# EAGLE board Module-WiFi-M0-v0.2-Board-1 (EAGLE 7.5.0)
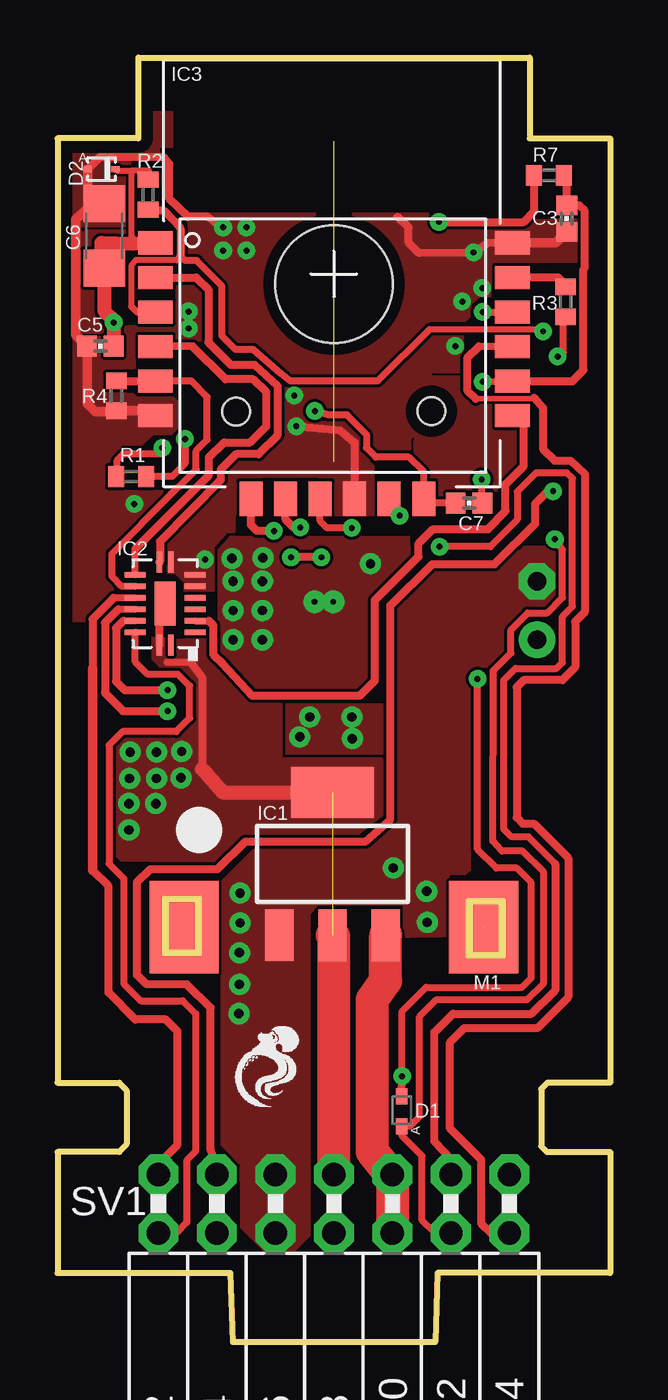
[diagram p0: board, top side]
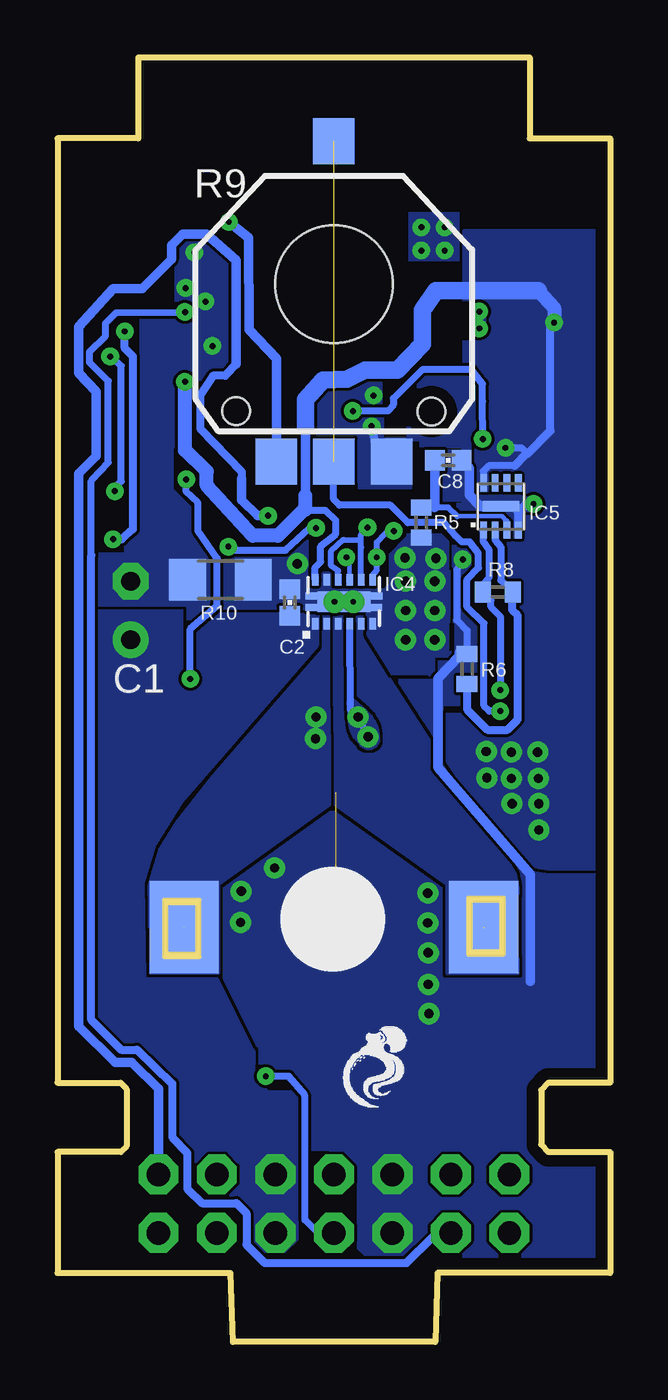
[diagram p1: board, bottom side, seen from below]

Size 24 x 55.75 mm. Coordinates in mm from the lower left corner, seen from the top.
Outline: 0,3 7.5,3 7.6,0 16.4,0 16.5,3 24,3 24,8.25 21.25,8.25 21,8.5 21,10.98 21.27,11.25 24,11.25 24,52.25 20.5,52.25 20.5,55.75 3.5,55.75 3.5,52.25 0,52.25 0,11.25 2.68,11.25 3,10.93 3,8.57 2.68,8.25 0,8.25 0,3
Copper layers (1*16): Top 0.035mm / dielectric 1.5mm / Bottom 0.035mm
Design rules "advancedCkt_temp *": minimum track width 5mil, minimum drill 10mil, track to track 5mil, track to pad 5mil, pad to pad 5mil, via to via 5mil, smd to smd 5mil, copper to edge 20mil, drill to drill 10mil, minimum pad ring 14mil, minimum via ring 10mil, stop-mask expansion 4mil, vias tented up to drill 0mil, thermal gap 10mil
tRestrict: area 5.5,32.4 to 6.8,32.5; area 4.4,51.6 to 5,51.8; 73 lines
bRestrict: area 5.2,48.3 to 6.5,49; area 8.8,46.1 to 9,49.1; area 21.1,34.3 to 22.4,34.4; area 18.4,31 to 18.5,31.9; area 6.8,30 to 7,31.2; area 6.9,31 to 6.9,31.5; area 13,33.7 to 13.1,35; area 18.9,45 to 19.1,46.5; area 20.4,42.9 to 20.5,44.5; area 8.2,36.9 to 11,37; area 6.5,27.3 to 7.2,27.6; area 13.8,10.9 to 14.8,11; 5 more areas; 24 lines

## Footprints (pad centres in the part's own frame; a part is rotated, then mirrored left to right if it is on the bottom)
CAP-SLEEP = drill 0.813 pad 1.575: + 1.27,0 | drill 0.813 pad 1.575 octagon: - -1.27,0
0402-CAP = smd 0.85 x 0.9: 1 -0.58,0; 2 0.58,0
1206 = smd 1.6 x 1.8: 1 -1.4,0; 2 1.4,0
SOD523 = smd 0.7 x 0.5: A 0.7,0; C -0.6,0
SOD-923 = smd 0.36 x 0.25: A -0.6,0; C 0.6,0
SOT223 = smd 1.219 x 2.235: 1 -2.311,-3.099; 2 0,-3.099; 3 2.311,-3.099 | smd 3.6 x 2.2: 4 0,3.099
DHVQFN16 = smd 0.24 x 0.9: 1 -0.25,1.8; 8 -0.25,-1.8; 9 0.25,-1.8; 16 0.25,1.8 | smd 0.9 x 0.24: 2 -1.3,1.25; 3 -1.3,0.75; 4 -1.3,0.25; 5 -1.3,-0.25; 6 -1.3,-0.75; 7 -1.3,-1.25; 10 1.3,-1.25; 11 1.3,-0.75; 12 1.3,-0.25; 13 1.3,0.25; 14 1.3,0.75; 15 1.3,1.25 | smd 0.9 x 1.9: EPAD 0,0
WT8266 = smd 1.5 x 1: 1 -7.75,1.35; 2 -7.75,-0.15; 3 -7.75,-1.65; 4 -7.75,-3.15; 5 -7.75,-4.65; 6 -7.75,-6.15; 13 7.75,-6.15; 14 7.75,-4.65; 15 7.75,-3.15; 16 7.75,-1.65; 17 7.75,-0.15; 18 7.75,1.35 | smd 1 x 1.5: 7 -3.6,-9.75; 8 -2.1,-9.75; 9 -0.6,-9.75; 10 0.9,-9.75; 11 2.4,-9.75; 12 3.9,-9.75
DSS12_P9X2 = smd 0.5 x 0.28: 1 -0.959,1.25; 2 -0.959,0.75; 3 -0.959,0.25; 4 -0.959,-0.25; 5 -0.959,-0.75; 6 -0.959,-1.25; 7 0.959,-1.25; 8 0.959,-0.75; 9 0.959,-0.25; 10 0.959,0.25; 11 0.959,0.75; 12 0.959,1.25 | smd 0.9 x 2.3: 13 0,0 | smd 0.305 x 0.61: 13@1 -0.25,1.36; 13@2 0.25,1.36; 13@3 -0.25,-1.36; 13@4 0.25,-1.37 | drill 0.254 pad 0.508: G1 0,0.406; G2 0,-0.406
DFN-8 = smd 0.3 x 0.75: 1 -0.75,-1.025; 2 -0.25,-1.025; 3 0.25,-1.025; 4 0.75,-1.025; 5 0.75,1.025; 6 0.25,1.025; 7 -0.25,1.025; 8 -0.75,1.025 | smd 1.6 x 0.45: PAD 0,0
MOTOR-NO_HOLE = smd 3 x 4: M1@1 6.5,0; M2@1 -6.51,0 | smd 3 x 4 bottom: M1@2 6.5,0; M2@2 -6.5,0
R0402 = smd 0.7 x 0.9: 1 -0.65,0; 2 0.65,0
ANGLE_SENSOR_MURATA = smd 1.8 x 2: 1 -2.5,-7.7; 2@1 0,-7.7; 2@2 0,6.2; 3 2.5,-7.7 | hole 5.1: 0,0 | hole 1.2: -4.24,-5.51; 4.24,-5.53
R1206 = smd 1.6 x 1.803: 1 -1.422,0; 2 1.422,0
FE07-2W = drill 1.016 octagon: 1 -7.62,1.27; 2 -7.62,-1.27; 3 -5.08,1.27; 4 -5.08,-1.27; 5 -2.54,1.27; 6 -2.54,-1.27; 7 0,1.27; 8 0,-1.27; 9 2.54,1.27; 10 2.54,-1.27; 11 5.08,1.27; 12 5.08,-1.27; 13 7.62,1.27; 14 7.62,-1.27

## Placement (x,y rotation side)
C1  47uF, 25V  [CAP-SLEEP]  20.82,31.75 270 bottom
C2  10uF  [0402-CAP]  13.91,32.09 90 bottom
C3  0.1uF  [0402-CAP]  22.11,48.76 270 top
C5  10uF  [0402-CAP]  1.86,43.22 180 top
C6  100u  [1206]  2.03,48.02 90 top
C7  10u  [0402-CAP]  17.87,36.41 0 top
C8  0.1uF  [0402-CAP]  7.03,38.26 0 bottom
D1  PMEG3005EB  [SOD523]  14.94,10.06 270 top
D2  ESD9X5  [SOD-923]  1.91,50.91 0 top
IC1  LM1117_3.3VSOT223  [SOT223]  11.94,20.75 0 top
IC2  74HC4051_DHVQFN16  [DHVQFN16]  4.67,32.05 180 top
IC3  WT8266  [WT8266]  12,46.36 0 top
IC4  DRV8835DSSR  [DSS12_P9X2]  11.57,32.13 90 bottom
IC5  LM358-DFN  [DFN-8]  4.75,36.27 0 bottom
M1  Round Motor  [MOTOR-NO_HOLE]  12,18 0 top
R1  3k  [R0402]  3.19,37.56 180 top
R2  3k  [R0402]  3.93,49.79 90 top
R3  30k  [R0402]  22.06,45.15 90 top
R4  30k  [R0402]  2.56,41.07 90 top
R5  30k  [R0402]  8.21,35.57 270 bottom
R6  3k  [R0402]  6.22,29.21 270 bottom
R7  30k  [R0402]  21.34,50.64 180 top
R8  30k  [R0402]  4.88,32.55 0 bottom
R9  10k  [ANGLE_SENSOR_MURATA]  12,45.92 0 bottom
R10  0.02E, 1W  [R1206]  16.92,33.08 180 bottom
SV1  [FE07-2W]  12,6 0 top

## Library data of the parts
C1 D2 IC2 IC3 M1 R9 = 1_ZeroUI
C2 C3 C5 C7 C8 = 1_ZeroUI; PROD_ID: CAP-12416
C6 = SparkFun-Passives
D1 = diode
IC1 = 1_ZeroUI; PROD_ID: VREG-08170
IC4 = 1_ZeroUI; MANUFACTURER_PART_NUMBER: drv8835_dss_12; VENDOR: Texas Instruments
IC5 = 1_ZeroUI; VARIANT: DFN
R1-R8 R10 = rcl
SV1 = con-lsta; OC_FARNELL: unknown; OC_NEWARK: unknown

## Nets
3.3V: C3.1 C5.1 C6.1 D2.C IC1.2 IC1.4 IC2.16 IC2.EPAD IC3.1 IC3.14 IC4.12 IC5.8 R1.2 R2.2 R7.1 SV1.7
CHG_ON: IC2.12 SV1.1
DTR: C7.2 D1.C SV1.8
GND: C1.- C3.2 C5.2 C6.2 C8.2 D2.A IC1.1 IC2.6 IC2.7 IC2.8 IC3.6 IC3.10 IC3.18 IC5.4 IC5.PAD R4.1 R6.1 R9.3 R10.2 SV1.5 SV1.6
LED-G: IC3.16 SV1.4
MOT-1: IC4.2 IC4.4 M1.M1@1 M1.M1@2
MOT-2: IC4.3 IC4.5 M1.M2@1 M1.M2@2
MOT_IN1: IC3.8 IC4.8 IC4.10
MOT_IN2: IC3.7 IC4.7 IC4.9
MOT_IRAW: C2.2 IC4.6 IC4.11 IC4.13 IC4.13@1 IC4.13@2 IC4.13@3 IC4.13@4 IC4.G1 IC4.G2 R5.2 R10.1
MOT_ISNS: IC2.14 IC5.1 R8.1
MOT_POS: IC2.13 R9.2@1 R9.2@2
MUX_COM: IC2.3 IC3.13
MUX_S0: IC2.11 IC3.5 R4.2
MUX_S1: IC2.10 IC3.4
MUX_S2: IC2.9 IC3.2
N$1: IC3.17 R3.2
N$10: C8.1 IC5.3 R5.1
N$17: R7.2 R9.1
N$18: IC5.2 R6.2 R8.2
PROGL/LED-B: D1.A IC3.3 R2.1 SV1.12
PWR_EN: R3.1 SV1.3
RST: C7.1 IC3.12 R1.1
RXD/LED-R: IC3.9 SV1.11
SW_INT: IC3.15 SV1.14
TXD: IC3.11 SV1.13
VBATT_SENSE: IC2.15 SV1.2
VDD: C1.+ C2.1 IC1.3 IC4.1 SV1.9 SV1.10

## Tracks (layer width: path | path; a pad name or v marks a point on that pad's centre or on a via)
3.3V  (via drill 0.25, 0.41)  (1 unrouted)
  Top 0.254: R2.2 3.96,50.85 3.23,50.85 | 3.23,47.92 3.23,50.85 | D2.C 2.57,50.85 3.23,50.85
  Top 0.305: 1.91,45.99 1.91,46.84 | 2.59,37.9 2.59,38.28 2.87,38.56 4.47,38.56 v4.55,38.81 | 4.75,29.51 5.77,29.51 | v18.47,41.68 IC3.14
  Top 0.356: C6.1 1.91,45.99 | 3.26,47.68 3.23,47.92 | IC3.14 22.35,41.71 22.84,42.19 22.84,46.56 22.89,46.62 22.89,49.1 22.66,49.33 22.12,49.33 C3.1 22.11,50.52 R7.1 | R1.2 2.59,37.9 | IC2.16 4.42,31.8 IC2.EPAD | 5.77,29.51 6.27,28.85 6.27,24.87
  Top 0.406: C6.1 2.03,46.37 | 2.44,44.35 v2.44,44.25
  Top 0.61: 1.91,46.84 1.91,47.71 3.26,47.68 IC3.1 | 2.03,46.37 2.03,44.76 2.44,44.35 | v2.44,44.25 C5.1 | 6.27,24.87 7.16,23.85 IC1.4
  Top 1.422: SV1.7 12,17.59 IC1.2
  Bottom 0.305: IC4.12 12.82,33.61 12.57,33.86 12.57,34.54 11.91,35.08 11.91,35.66 12.37,36.09 13.26,36.09 | 13.34,36.09 13.26,36.09 | 13.26,36.09 13.23,36.12 | v2.44,44.25 | v4.55,38.81 3.86,38.81 3.58,38.53 3.58,38.56 | 4.15,38.04 5.27,38.04 5.51,37.8 5.51,37.21 IC5.8
  Bottom 0.356: v2.44,44.25 2.59,44.09 2.59,39.55 3.58,38.56 3.63,38.56 4.15,38.04
  Bottom 0.406: 13.23,36.73 13.23,39.73
  Bottom 0.61: 13.34,36.09 14.43,35 15.52,35 17.53,37.18 17.53,37.8 18.47,38.71 v18.47,41.68 | 13.23,36.12 13.23,36.73 | 3.12,45.64 2.44,44.88 v2.44,44.25
  Bottom 0.762: 13.23,39.73 13.23,40.89 12.47,41.76 11.43,41.78 10.64,42.19 9.25,42.19 8.16,43.32 8.16,44.78 7.57,45.64 3.12,45.64
  other vias: 3.1,23.37 3.1,22.23 4.29,25.6 3.15,25.6 3.12,24.46 4.29,24.46 5.38,25.63 5.36,24.49 4.27,23.37
  pour Top (no thermals): 13.06,22.05 14.15,22.91 14.1,25.3 9.73,25.3 9.73,27.68 8.3,27.7 7.06,29.18 6.63,29.62 6.63,30.51 6.68,30.56 0.1,30.51 0.13,25.53 -0.05,25.78 -0.05,20.42 0.03,20.32 7.11,20.32 7.1,20.68 8.25,22.05
  pour Bottom (no thermals): -5.16,20.47 2.68,20.52 arc50 3.86,21.08 6.3,24.02 7.21,25.43 7.44,25.81 7.39,29.44 6.27,29.49 6.35,38.79 6.35,48.26 -5.16,48.26
CHG_ON
  Top 0.305: IC2.12 2.43,32.3
  Top 0.356: 2.43,32.3 1.52,31.37 1.52,29.26 | SV1.1 4.38,7.73 5.21,8.56 5.21,13.49 4.7,13.99 3.38,13.99 2.21,15.16 2.21,19.79 1.52,20.47
  Top 0.406: 1.52,20.47 1.52,29.26
DTR  (via drill 0.25)
  Top 0.305: v18.41,37.44 18.41,36.4 C7.2 | v14.96,11.53 14.96,14.35 16,15.39 20.17,15.39 20.57,15.8 20.57,19.94 19.94,20.57 19.05,20.57 18.24,21.39 v18.24,28.78
  Top 0.356: D1.C v14.96,11.53
  Bottom 0.305: SV1.8 12.68,4.73 13.23,5.28 13.26,5.28 13.26,10.69 13.97,11.53 v14.96,11.53 | v18.24,28.78 18.24,30.94 17.07,31.95 17.07,34.01 17.91,35.2 17.91,36.42 18.41,36.91 v18.41,37.44
GND  (via drill 0.25, 0.41)
  Top 0.254: C6.2 1.51,49.37
  Top 0.305: v18.06,47.3 18.08,47.27 | v7.19,48.39 7.09,48.39 6.53,48.84
  Top 0.356: 4.04,40.42 IC3.6 | R4.1 2.53,40.39 | v10.36,39.75 12.27,39.57 12.9,39.04 12.9,38.43 IC3.10 | IC3.18 18.69,47.7 18.08,47.27 15.7,47.27 15.24,47.73 15.24,48.39 14.76,48.84 | 6.53,48.84 5.66,48.84 4.85,49.63 4.85,51.13 4.6,51.44 1.83,51.44 D2.A
  Top 0.406: 4.04,40.42 R4.1 | 2.53,40.39 1.63,40.39 1.28,40.73 C5.2 0.79,43.71 0.79,48.74 1.51,49.37 1.31,49.57 D2.A | C3.2 21.64,47.71 IC3.18
  Bottom 0.305: v6.4,33.96 6.67,33.52 6.67,31.33 6.22,30.89 6.22,30.86 R6.1
  Bottom 0.356: v10.36,39.75 10.24,39.12 9.88,38.83 | IC5.4 4,36.03 4.24,36.27 IC5.PAD
  Bottom 0.406: R9.3 9.88,38.83 9.75,38.1 | 3.48,15.65 3.48,20.3 7.49,24.94 7.49,28.8 6.55,29.77 6.55,29.93 R6.1 | IC5.PAD 5.64,36.27 6.12,36.75 6.12,37.93 C8.2 | v3.33,36.37 3.65,36.37 4,36.03
  other vias: 7.92,19.48 16.05,18.21 7.9,15.52 14.58,20.57 7.87,14.25 7.9,16.89 7.92,18.19 17.58,45.16 18.44,45.75 17.27,43.23 10.28,41.08 8.2,48.39 8.2,47.37 7.19,47.37 5.69,43.99 5.69,44.73 16.03,19.56
  pour Bottom (rank 6, no thermals): 0,0 24.13,0 24.13,55.88 0,55.88
  pour Top (rank 6, no thermals): 7.11,3.81 11.15,3.81 11.15,17.53 17.98,17.65 18.03,32.84 14.61,32.82 14.58,23.09 13.26,22 7.11,22
  pour Top (rank 2, no thermals): 24.56,39.32 15.44,39.32 15.44,29.29 24.56,29.29
  pour Top (isolate 0.025, rank 2, no thermals): -5.08,53.34 30.48,53.34 30.53,35.15 15.32,35.03 7.47,35.03 6.86,34.42 6.83,34.42 6.83,31.34 -5.03,31.34
LED-G  (via drill 0.25)
  Top 0.305: v18.47,44.7 IC3.16
  Bottom 0.305: 22.53,34.14 22.53,37.39 21.79,38.17 21.79,41.71 22.61,42.52 22.61,42.98 21.92,43.66 21.92,44.22 21.46,44.68 v18.47,44.7
  Bottom 0.356: 22.53,34.14 22.53,13.97 21.25,12.69 20.55,12.69 19.02,11.2 19.02,8.89 18.36,8.2 18.36,6.66 17.73,6.02 16.23,6.02 15.8,5.59 15.8,4.22 15.01,3.43 8.84,3.43 7.72,4.55 7.1,4.55 SV1.4
MOT-1  (via drill 0.41)  (1 unrouted)
  Bottom 0.305: IC4.4 11.29,27.43 v10.95,27.13 v10.52,26.26
  other vias: 12.8,26.19 12.78,27.13
  pour Bottom (rank 3, no thermals): 12.23,31.97 12.23,28.09 12.19,25.81 12.19,23.32 12.19,23.32 17,19.86 17,16 20,16 20.08,19.9 19.48,21.74 15.49,26.82 12.58,30.2 12.6,30.5 12.6,32
  pour Bottom (rank 2, no thermals): 11.32,27 11.38,27.77 arc131 11.16,27.87 10.61,27.39 arc49 10.06,26.16 arc130 10.79,25.86 10.84,25.96 arc51
  pour Top (rank 4, no thermals): 9.88,27.69 14.2,27.66 14.2,25.37 9.88,25.4
MOT-2  (1 unrouted)
  Bottom 0.254: 5.4,18 M1.M2@2
  pour Bottom (rank 3, no thermals): 3.99,16 3.99,19.69 4.1,20.27 4.43,20.81 10.79,30.66 10.67,31.52 11.05,31.52 11,23.34 11.92,23.29 7.11,19.87 7.11,16
  pour Bottom (rank 4, no thermals): 12.34,23.32 12.34,25.17 12.12,25.73 12.12,31.67 11.48,31.67 10.26,23.34
MOT_IN1  (via drill 0.25)
  Top 0.356: v10.54,35.36 10.24,35.36 9.9,35.69 IC3.8
  Bottom 0.254: IC4.10 11.82,33.48 12.12,33.68 12.12,34.34 11.58,34.82 10.85,34.8 10.82,35.05 | 10.82,35.05 v10.54,35.36 | IC4.8 10.82,34.49 10.82,35.05
MOT_IN2  (via drill 0.25)
  Top 0.356: v11.46,34.06 v10.14,34.06 | v9.4,35.2 8.66,35.2 8.4,35.47 IC3.7
  Bottom 0.203: IC4.7 10.32,33.27 | IC4.9 11.32,33.95 v11.46,34.06
  Bottom 0.254: 10.32,33.27 10.13,33.5 v10.14,34.06 10.14,34.72 9.75,35.1 9.63,35.2 v9.4,35.2
MOT_IRAW  (via drill 0.41)
  other vias: 13.59,33.78 8.92,34.04 8.89,30.48 8.89,33.02 7.57,34.01 7.62,33.02 7.62,31.75 8.89,31.75 7.62,30.48
  pour Bottom (no thermals): 17.78,35.03 6.73,35.08 6.81,34.32 6.65,29.74 7.67,29.74 7.72,26.21 10.52,30.71 10.54,31.8 17.81,31.83
  pour Top (no thermals): 15.27,34.92 7.49,34.92 6.99,34.37 6.99,29.77 8.51,28.02 14.45,28.04 14.45,31.88 15.33,32.72
MOT_ISNS  (via drill 0.25)
  Top 0.305: IC2.14 2.85,31.3
  Top 0.356: 2.85,31.3 2.54,30.99 2.54,28.68 2.92,28.3 v4.78,28.3
  Bottom 0.305: R8.1 5.18,32.2 5.18,31.9 4.78,31.5 v4.78,28.3 | 5.53,32.85 5.26,33.2 5.26,34.37 5.51,34.75 5.51,35.23
  Bottom 0.356: R8.1 5.53,32.85 | 5.51,35.23 IC5.1
MOT_POS  (via drill 0.25)  (1 unrouted)
  Top 0.305: IC2.13 2.64,31.8
  Top 0.356: 2.64,31.8 2.06,31.22 2.06,28.17 2.85,27.38 v4.78,27.38
  Bottom 0.305: 11.99,38.23 R9.2@1 | v4.78,27.38 5.26,27.38 5.49,27.61 5.49,31.19 6.22,31.9 6.22,33.1 5.72,33.6 5.73,34.25 6.1,34.72 6.45,34.72 6.73,35 7.21,35.56 8.79,35.56 9.55,36.32 11.76,36.32 12.01,36.58 12.01,38.21
  Bottom 0.356: 12.01,38.21 R9.2@1
MUX_COM
  Top 0.305: IC2.3 6.57,31.3
  Top 0.356: 6.57,31.3 6.76,31.11 6.76,29.84 7.16,29.44 8.46,28.04 13.12,28.04 13.77,28.69 13.77,32.18 15.67,34.09 15.67,34.65 16.3,35.28 18.69,35.28 19.46,36.07 19.46,37.21 20.24,38.02 20.24,39.99 IC3.13
MUX_S0
  Top 0.305: IC2.11 2.79,32.8 2.36,33.22 2.36,34.21 4.93,36.8 5.59,37.44 6.02,37.87 6.02,38.68 6.5,39.17 6.5,41.02 5.82,41.71 IC3.5
  Top 0.356: R4.2 IC3.5
MUX_S1
  Top 0.305: IC2.10 3.37,34.41
  Top 0.356: 3.37,34.41 6.58,37.62 6.58,38.41 7.24,39.04 8.36,39.04 9.07,39.75 9.07,41.22 8.48,41.78 7.29,41.78 5.87,43.2 4.28,43.23 IC3.4
MUX_S2
  Top 0.356: IC3.2 6.02,46.21 6.55,45.67 6.55,43.38 7.52,42.42 8.56,42.42 9.55,41.5 9.55,39.34 8.74,38.53 7.75,38.53 7.09,37.87 7.09,37.41 4.45,34.75 4.45,33.87 IC2.9
N$1
  Top 0.356: R3.2 22.06,45.88 21.74,46.2 IC3.17
N$10
  Bottom 0.203: 4.5,35.61 4.7,35.84 6.64,35.84
  Bottom 0.254: IC5.3 4.5,35.61 | 6.64,35.84 7.04,36.22 7.63,36.21
  Bottom 0.305: 7.63,36.21 R5.1
  Bottom 0.406: C8.1 7.62,36.27 7.63,36.21
N$17  (via drill 0.25)
  Top 0.356: v16.56,48.62 20.24,48.62 20.7,49.07 20.7,50.63 R7.2
  Bottom 0.406: R9.1 14.5,42.68 15.69,43.94 15.72,47.94 v16.56,48.62
N$18
  Bottom 0.305: IC5.2 5,34.82 4.75,34.52 4.75,33.06 R8.2
  Bottom 0.356: R6.2 6.22,27.45 5.33,26.57 4.47,26.57 4.01,27.03 4.01,31.52 4.24,31.75 4.24,32.54 R8.2
PROGL/LED-B  (via drill 0.25)
  Top 0.254: 4.15,44.93 IC3.3 | 5.18,46.97 3.4,46.97 3.2,46.71 3.2,44.96 | 21.16,43.94 16.15,43.94
  Top 0.305: 5.18,46.97 5.33,47.14 5.54,46.94 6.04,46.94 7.14,45.82 7.14,43.66 7.72,43.08 8.51,43.08 9.7,42.04 10.11,41.71 13.89,41.71 16.15,43.94 | 3.2,44.96 3.45,44.71 IC3.3 | SV1.12 16.38,4.73 15.82,5.28 15.82,8.07 14.96,8.94 14.96,9.37 D1.A 15.32,9.38 15.72,9.78 15.72,14.12 16.46,14.86 20.4,14.86 21.11,15.57 21.11,20.4 20.19,21.31 19.3,21.31 18.9,21.74 18.92,29.13 19.68,29.9 19.68,30.91 20.42,31.65 21.26,31.65 21.92,32.31 21.92,34.39 v21.59,34.85 | v21.08,43.87 21.18,43.81 21.16,43.94
  Top 0.356: R2.1 4.1,49.12 4.6,49.12 5.33,48.34 5.33,47.14
  Bottom 0.356: v21.08,43.87 21.08,43.13 20.73,42.77 20.73,35.28 21.21,34.85 v21.59,34.85
PWR_EN  (via drill 0.25)
  Top 0.305: v21.72,42.77 21.97,42.95 21.97,44.25 22.1,44.32 21.95,44.39 R3.1
  Top 0.356: SV1.3 6.92,7.76 6.66,8.31 6.66,14.5 5.61,15.52 3.86,15.52 3.45,15.93 3.45,19.96 4.04,20.52 6.95,20.52 8.15,21.72 13.36,21.72 14.45,22.68 14.45,31.97 16.27,33.76 18.97,33.76 20.73,35.51 20.73,36.37 21.29,36.93 v21.52,36.93
  Bottom 0.305: v21.52,36.93 21.57,37.03 21.23,37.36 21.23,42.37 21.77,42.88 v21.72,42.77
RST  (via drill 0.25)
  Top 0.305: C7.1 16.09,36.41 IC3.12 15.9,37.77 15.27,38.41 13.82,38.41 13.41,38.81 13.41,39.4 12.57,40.23 11.76,40.23 v11.18,40.41 | v5.54,39.19 5.54,38.12 4.98,37.57 R1.1
  Bottom 0.305: v5.54,39.19 5.55,40.82 5.54,41.59 6.03,42.2 8.17,42.2 9.42,40.95 9.42,40.66 9.65,40.41 v11.18,40.41
RXD/LED-R  (via drill 0.25)
  Top 0.305: 21.61,20.75 20.45,21.92 19.71,21.92 19.38,22.25 19.38,28.73 19.89,29.23 21.67,29.23 21.92,29.49 21.92,31.5 22.35,31.93 22.35,37.49 22.12,37.72 20.78,37.72 19.96,36.91 19.96,35.69 18.8,34.52 v16.59,34.52 | v12.78,35.33 11.71,35.33 11.4,35.64 11.4,36.47 IC3.9
  Top 0.356: SV1.11 17.12,7.9 16.36,8.71 16.36,13.44 17.17,14.25 20.57,14.25 21.61,15.27 21.61,20.75
  Bottom 0.305: v16.59,34.52 16.56,34.37 14.1,34.37 13.06,35.33 v12.78,35.33 12.62,35.33
SW_INT
  Top 0.254: 18.16,40.95 20.7,40.97
  Top 0.305: IC3.15 18.29,43.21
  Top 0.356: 18.29,43.21 17.78,42.7 17.78,41.33 18.16,40.95 | 20.7,40.97 21.08,40.54 21.08,38.76 21.59,38.25 22.28,38.25 22.89,37.69 22.89,31.68 22.48,31.27 22.48,29.29 21.92,28.73 20.24,28.73 19.94,28.42 19.94,22.76 20.19,22.5 20.68,22.5 22.17,21.01 22.17,14.96 20.83,13.61 17.65,13.61 17.02,12.98 17.02,9.3 18.39,7.92 18.39,5.16 18.82,4.73 SV1.14
TXD  (via drill 0.25)
  Top 0.406: IC3.11 14.4,36.12 v14.86,35.87
  Bottom 0.356: 16.25,42.43 16.72,41.94 17.25,41.94 17.8,41.1 17.8,39.65 16,37.77 16,37.47
  Bottom 0.406: 16,37.47 16,36.55 15.32,35.87 v14.86,35.87 | 16.25,42.43 16.25,46.96 17.52,48.08 18.57,48.08 19.05,47.6 19.05,46.99 20.32,45.72 21.59,45.72 23.09,44.07 23.09,42.06 22.33,41.25 22.33,38.46 23.09,37.69 23.09,13.69 21.49,12.14 20.78,12.14 19.62,10.98 SV1.13
VBATT_SENSE
  Top 0.305: IC2.15 3.38,29.52 3.91,28.98 5.23,28.98 5.74,28.47 5.74,27.08 5.16,26.49 2.82,26.49 2.23,25.91 2.23,20.75 2.87,20.12 2.87,15.54 3.61,14.81 5.44,14.81 5.99,14.25 5.99,8.28 5.61,7.87 5.61,5.18 5.18,4.75 4.4,4.75
  Top 0.356: 4.4,4.75 SV1.2
VDD
  Top 1.422: IC1.3 14.25,15.67 13.66,14.86 13.66,8.26 14.59,7.13 SV1.9 SV1.10
  pour Bottom (rank 2, no thermals): 13.18,4.11 13.23,4.17 13.23,10.85 14.83,10.85 15.47,11.48 15.44,12.57 15.54,12.73 17.04,15.75 20.19,15.75 20.27,19.94 19.77,21.6 18.6,23.43 12.7,30.25 12.67,31.65 12.75,31.72 22.81,31.72 22.83,31.7 22.83,10.41 22.91,10.34 22.91,3.96 22.89,3.94 13.34,3.94

## Text on the board
Reference: TOP PCB